# Altium PCB PCB1.PcbDoc
Units mil, origin at the board's own origin, x right, y up, seen from the top; angles counter-clockwise.
Board outline 2020 x 4000 mil, 2 copper layers (Top Layer, Bottom Layer); 26 components, 24 nets, 74 pads, 5 vias.
Unrouted connection lines stored in the file: 7.
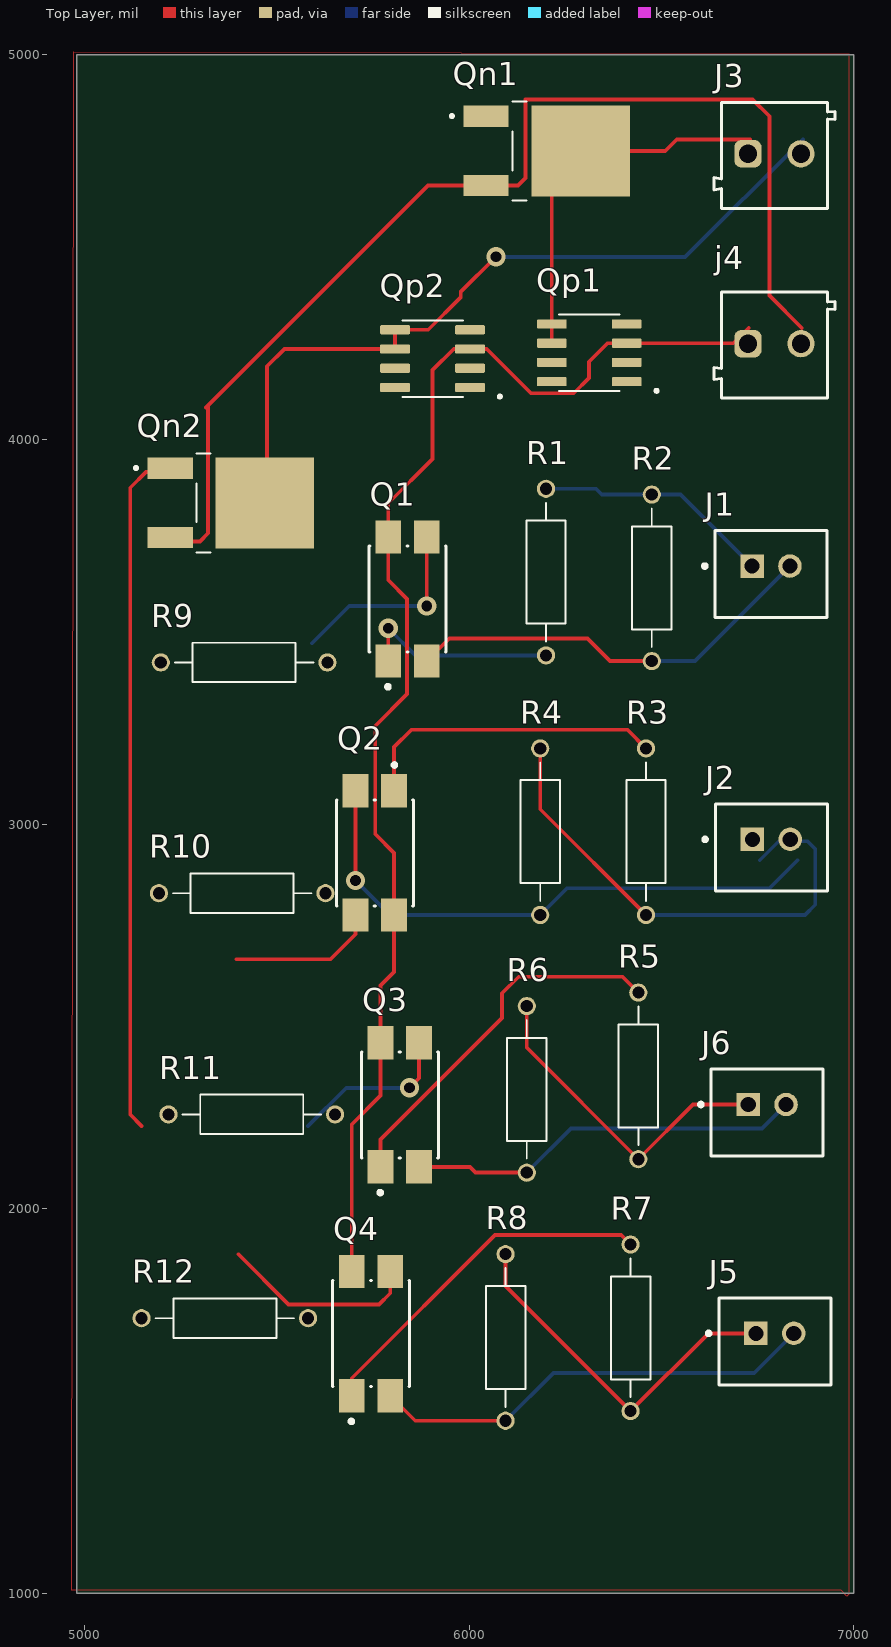
[diagram p0: Top Layer view]
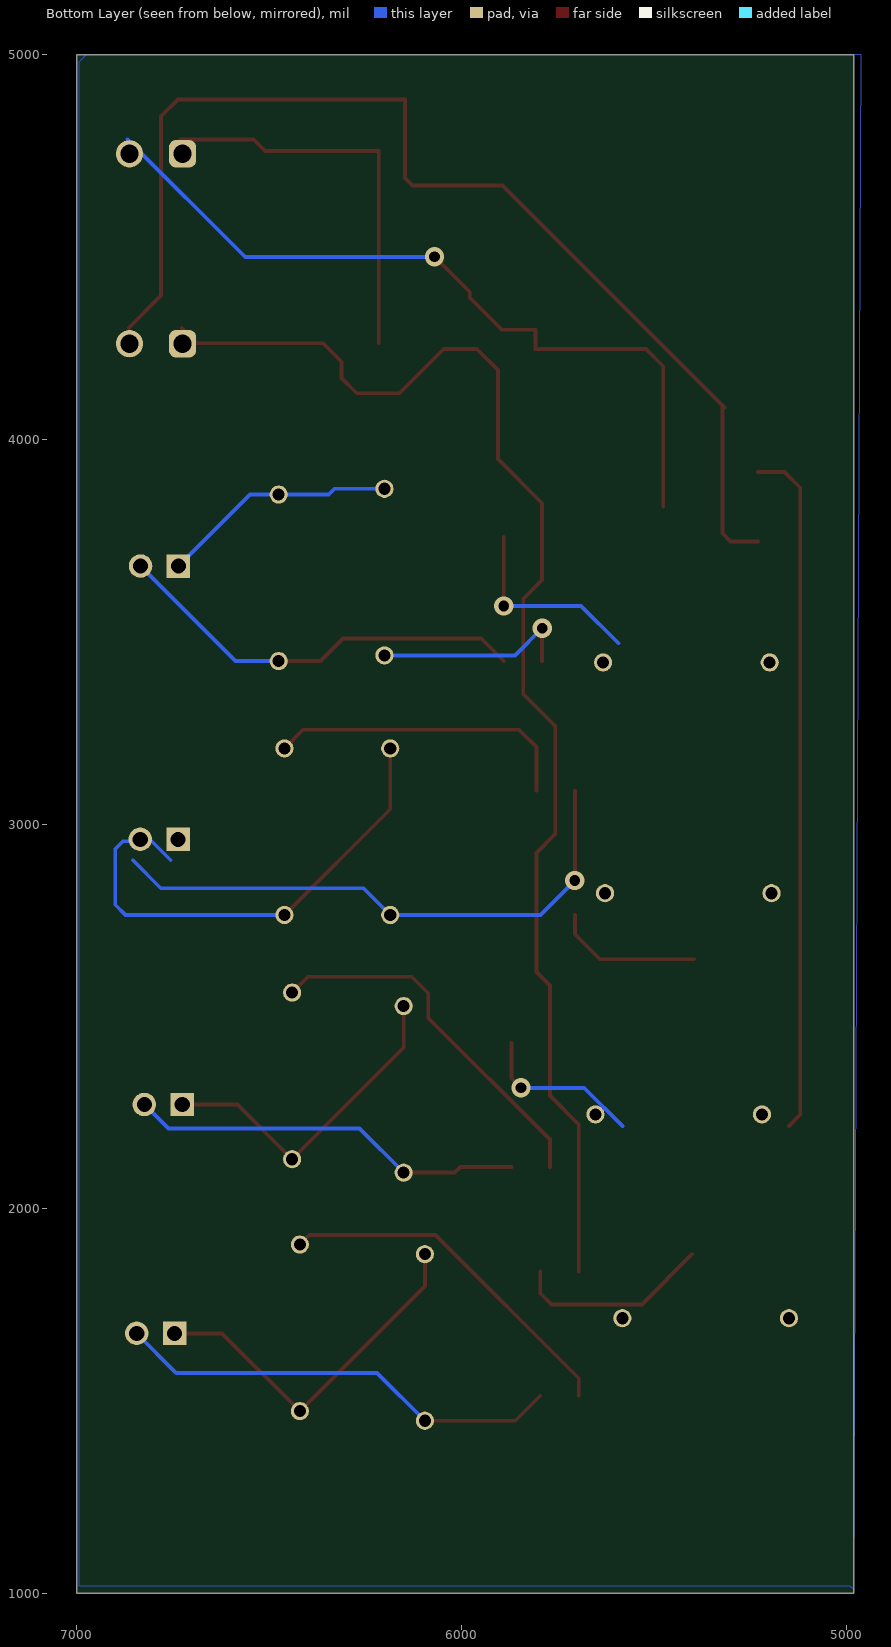
[diagram p1: Bottom Layer view, seen from below]
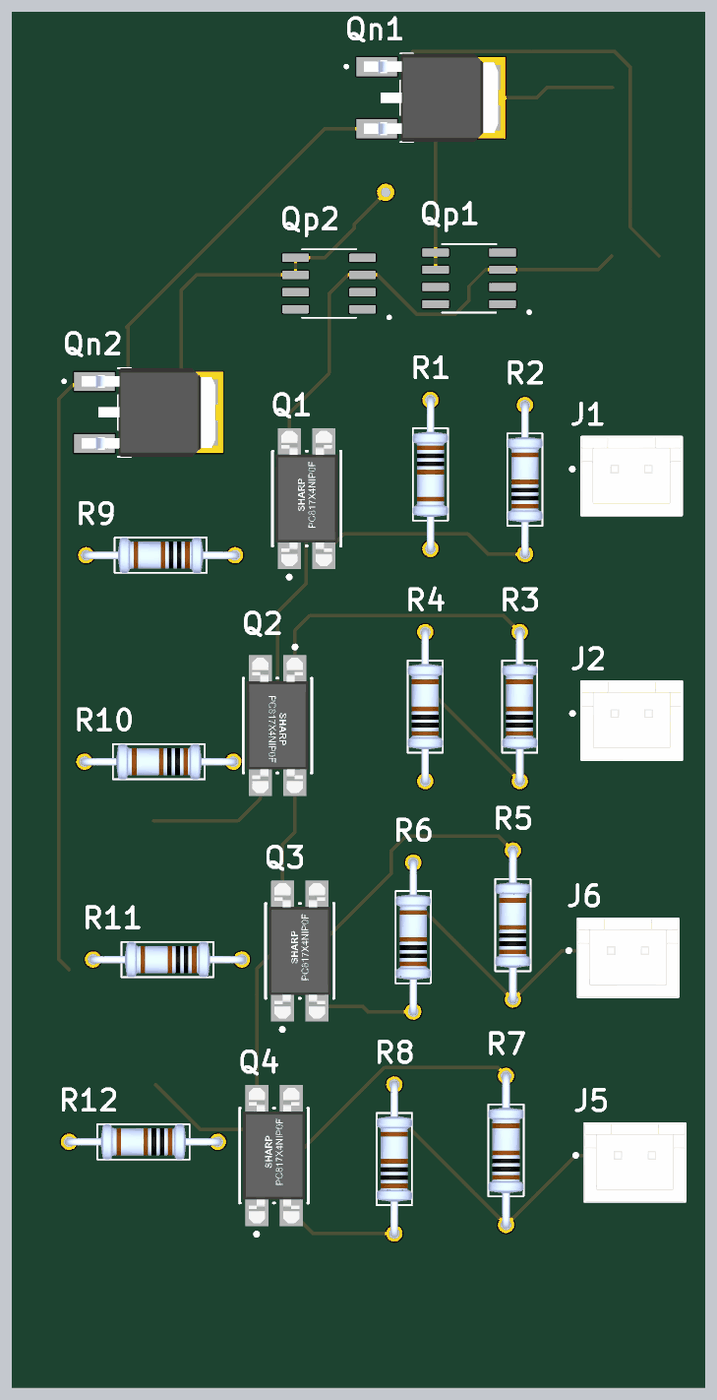
[diagram p2: 3D render of the assembled board from above, using the file's embedded part models]

## Layer stack, top to bottom
Top Solder: solder mask 0.4, Solder Resist, Dk 3.5
Top Layer: signal copper 1.4
Dielectric 1: dielectric 12.6, FR-4, Dk 4.8
Bottom Layer: signal copper 1.4
Bottom Solder: solder mask 0.4, Solder Resist, Dk 3.5

## Board outline
4980,1000 7000,1000 7000,5000 4980,5000

## Design rules (kind name [scope] priority, off if disabled: settings)
Clearance [All] p1: gap=10 ignorepadtopadclearanceinfootprint=FALSE
PolygonConnect [All] p1: connectstyle=Relief reliefconductorwidth=10 reliefentries=4 polygonreliefangle="90 Angle" airgapwidth=10
RoutingVias [All] p1: holewidth=28 width=50 viastyle="Through Hole" minholewidth=28 minwidth=50 maxholewidth=28 maxwidth=50
SolderMaskExpansion [All] p1: expansion=4 istentingtop=FALSE
SupplyNets "Schematic Supply Nets_1" [InNet('GND')] p1: voltage=0.000
SupplyNets "Schematic Supply Nets" [InNet('+12')] p2: voltage=0.000
Width [All] p1: maxlimit=10 minlimit=10 preferedwidth=10
30 further rules are at their usual default settings.

## Components (designator, comment, footprint, x,y, rotation, side; value= is the part's Value field where it differs from the comment)
J1 "B2B-XH-A(LF)(SN)" FP-B2B-XH-A_LF_SN-MFG 6785,3650 r0 top
J2 "B2B-XH-A(LF)(SN)" FP-B2B-XH-A_LF_SN-MFG 6785.79,2939.33 r0 top
J3 "691103110002" 691103110002 56793.95,54738.63 r0 top
j4 "691103110002" 691103110002 56793.95,54244.85 r0 top
J5 "B2B-XH-A(LF)(SN)" FP-B2B-XH-A_LF_SN-MFG 6795,1655 r0 top
J6 "B2B-XH-A(LF)(SN)" FP-B2B-XH-A_LF_SN-MFG 6775,2250 r0 top
Q1 "PC817X4NIP0F" FP-PC817X4NIP0F-MFG 5840,3585 r90 top
Q2 "PC817X4NIP0F" FP-PC817X4NIP0F-MFG 5755,2925 r270 top
Q3 "PC817X4NIP0F" FP-PC817X4NIP0F-MFG 5820,2270 r90 top
Q4 "PC817X4NIP0F" FP-PC817X4NIP0F-MFG 5745,1675 r90 top
Qn1 "TSM60NC390CP" TRANS_TSM60NC390CP 6201.42,4750 r0 top
Qn2 "TSM60NC390CP" TRANS_TSM60NC390CP 5380,3835 r0 top
Qp1 "FDS4953" SOIC127P600X175-8N 6312.44,4225 r180 top
Qp2 "FDS4953" SOIC127P600X175-8N 5905,4210 r180 top
R1 "MFR-25FBF52-10K" RESAD1100W55L680D260 6200,3655 r270 top
R2 "MFR-25FBF52-10K" RESAD1100W55L680D260 6475,3640 r90 top
R3 "MFR-25FBF52-10K" RESAD1100W55L680D260 6460,2980 r90 top
R4 "MFR-25FBF52-10K" RESAD1100W55L680D260 6185,2980 r90 top
R5 "MFR-25FBF52-10K" RESAD1100W55L680D260 6440,2345 r90 top
R6 "MFR-25FBF52-10K" RESAD1100W55L680D260 6150,2310 r90 top
R7 "MFR-25FBF52-10K" RESAD1100W55L680D260 6420,1690 r90 top
R8 "MFR-25FBF52-10K" RESAD1100W55L680D260 6095,1665 r90 top
R9 "MFR-25FBF52-430" RESAD1100W55L680D260 5415,3420 r180 top
R10 "MFR-25FBF52-430" RESAD1100W55L680D260 5410,2820 r180 top
R11 "MFR-25FBF52-430" RESAD1100W55L680D260 5435,2245 r180 top
R12 "MFR-25FBF52-430" RESAD1100W55L680D260 5365,1715 r180 top

## Footprints (in the part's own frame and the unit in brackets; to place one, negate y for a bottom-side part, rotate by r counter-clockwise, add the part's x,y. Pads: shape width x height; smd on the part's side, far side on the other; paste and mask are expansions set on the pad)
691103110002 [mm] "3,50mm - modular - blue - Horizontal wire entry - Pressure clamp - 8,4mm height - 02p"
  rrect50% 1.8x1.8 hole 1.2: 1(-1271.75,-1269.9)
  round 1.8 hole 1.2: 2(-1268.25,-1269.9)
  silkscreen extent -1274,-1273.5 -1266,-1266.5, body extent -1274,-1273.5 -1266,-1266.5, height 8.45
FP-B2B-XH-A_LF_SN-MFG [mm]
  rect 1.55x1.55 hole 1 paste-2539.97 mask+0: 1(-1.25,0.525)
  round 1.55 hole 1 paste-2539.97 mask+0: 2(1.25,0.525)
  silkscreen extent -4.5,-2.87 3.7,2.88, body extent -3.8,-2.98 3.8,2.98, height 0.25
FP-PC817X4NIP0F-MFG [mm]
  rect 2.2x1.7 smd paste+0 mask+0: 1(-4.1,1.27) 2(-4.1,-1.27) 3(4.1,-1.27) 4(4.1,1.27)
  silkscreen extent -5.92,-2.54 3.5,2.54, body extent -5.3,-2.64 5.3,2.64, height 0.25
RESAD1100W55L680D260 [mm]
  round 1.2 hole 0.8: 1(-5.5,0) 2(5.5,0)
  silkscreen extent -4.58,-1.3 4.58,1.3, body extent -5.77,-1.3 5.77,1.3, height 2.6
SOIC127P600X175-8N [mm]
  rrect25% 1.97x0.6 smd: 1(-2.475,1.905) 2(-2.475,0.635) 3(-2.475,-0.635) 4(-2.475,-1.905) 5(2.475,-1.905) 6(2.475,-0.635) 7(2.475,0.635) 8(2.475,1.905)
  silkscreen extent -4.54,-2.53 2,2.6
TRANS_TSM60NC390CP [mm]
  rect 3x1.4 smd: 1(-4,2.29) 3(-4,-2.29)
  rect 6.5x6 smd paste-4: 2_4(2.25,0)
  silkscreen extent -6.35,-3.27 -1.32,3.27, body extent -4.95,-3.27 4.95,3.27, height 2.39

## Part data
J1 J2 J5 J6: library part CMP-2000-05888-3, "CONN HEADER VERT 2POS 2.5MM", Color=Natural, Contact Resistance=20mR, Current Rating=3A, Housing Color=White, Insulation Resistance=1GR, Max Operating Temperature=85°C, Max Voltage Rating (AC)=250V, Min Operating Temperature=-25°C, Connector Type="Male Pin", Contact Material=Brass, Contact Plating=Tin, Contact Type="Male Pin", Depth=5.75mm, Fastening Type=Detent, Housing Material=Polyamide, Lead Free="Lead Free", Lead Pitch=2.5mm, Length=7.4mm, Max Current Rating=3A, Max Voltage Rating (DC)=250V, Mount="Through Hole", Number of Contacts=2, Number of Positions=2, Number of Rows=1, Orientation=Straight, Packaging=Bulk, Pitch=2.5mm, REACH SVHC="No SVHC", Series=XH, Termination=Solder, Voltage Rating=250V, Voltage Rating (AC)=250V, Wire/Cable Gauge=22AWG
J3 j4: library part CMP-1502-03254-2, Color=Blue, Current=10A, Max Operating Temperature=105°C, Min Operating Temperature=-40°C, Voltage=125V, Contact Material="Brass, Copper, Nickel, Tin, Zinc", Contact Plating=Tin, Current Rating=10A, Height=8.5mm, Housing Material=Nylon, Lead Pitch=3.5mm, Length=7mm, Mount="Through Hole", NexarPartId=18818286, Number of Contacts=2, Number of Levels=1, Number of Pins=2, Number of Positions Per Level=2, Number of Rows=1, Packaging=Box, Pitch=3.5052mm, Plating=Steel, REACH SVHC=Unknown, RoHS=Compliant, Stripping Length=-6mm, Termination=Screw, Voltage Rating=125V, Width=8mm, Wire Gauge (Max)=26AWG, Wire Gauge (Min)=16AWG, Wire/Cable Gauge=26AWG
Q1 Q2 Q3 Q4: library part CMP-65434-000001-1, "OPTOISOLATOR 5KV TRANS 4SMD", Collector Emitter Voltage=80V, Emiiter Collector Voltage=6V, Forward Current=20mA, Forward Voltage=1.2V, Isolation Voltage=5kVrms, Manufacturer=Sharp, Max Current Transfer Ratio=600%, Min Current Transfer Ratio=50%, Power Dissipation=200mW, Temperature="-30°C to +100°C", Temperature Range High=+100°C, Temperature Range Low=-30°C, Automotive=No, Category=Trans, ComponentLink2Description=Datasheet, ComponentLink2URL=https://www.sharpsde.com/fileadmin/products/Optoelectronics/Isolation%20Devices/Specs%20Photocoupler/PC817XxNIP0F_17Jun08_Spec_ED-04P129A.pdf, Device Class L1=Optoelectronics, Device Class L2=Optocouplers, Device Class L3=unset, Digikey Description="OPTOISOLATOR 5KV TRANS 4SMD", Height=4.6mm, Lead Free=Yes, Manufacturer Part Number=PC817X4NIP0F, Mouser Description="Transistor Output Optocouplers Photocoupler 300-600% CRT", Octopart=https://octopart.com/pc817x4nip0f-sharp-20650453, Package=PC817X4NIP0F, Reverse Voltage=6V, RoHS=TRUE, Standoff Height=0.1mm
Qn1 Qn2: "600V, 11A, Single N-Channel High Voltage MOSFETs", Package="TO-252-3 Taiwan Semiconductor", Check_prices=https://www.snapeda.com/parts/TSM60NC390CP/Taiwan+Semiconductor/view-part/?ref=eda, MF="Taiwan Semiconductor", MP=TSM60NC390CP, SnapEDA_Link=https://www.snapeda.com/parts/TSM60NC390CP/Taiwan+Semiconductor/view-part/?ref=snap
Qp1 Qp2: "Mosfet Array 2 P-Channel _Dual_ 30V 5A 900mW Surface Mount 8-SOIC", Package="SOIC-8 ON Semiconductor", Availability=Unavailable, MF="ON Semiconductor", MP=FDS4953, Price=None, SnapEDA_Link=https://www.snapeda.com/parts/FDS4953/ON%20Semiconductor/view-part/1564044/?ref=snap
R1 R2 R3 R4 R5 R6 R7 R8: "10.2 kOhms Â±1% 0.25W, 1/4W Through Hole Resistor Axial - Metal Film", Package="Axial Yageo", Availability="In Stock", Check_prices=https://www.snapeda.com/parts/MFR-25FBF52-10K/Yageo/view-part/?ref=eda, MF=Yageo, MP=MFR-25FBF52-10K, Price=None, Purchase-URL=https://pricing.snapeda.com/search/part/MFR-25FBF52-10K/?ref=eda, SnapEDA_Link=https://www.snapeda.com/parts/MFR-25FBF52-10K/Yageo/view-part/?ref=snap
R9 R10 R11 R12: library part MFR-25FBF52-10K, "10.2 kOhms Â±1% 0.25W, 1/4W Through Hole Resistor Axial - Metal Film", Package="Axial Yageo", Availability="In Stock", Check_prices=https://www.snapeda.com/parts/MFR-25FBF52-10K/Yageo/view-part/?ref=eda, MF=Yageo, MP=MFR-25FBF52-10K, Price=None, Purchase-URL=https://pricing.snapeda.com/search/part/MFR-25FBF52-10K/?ref=eda, SnapEDA_Link=https://www.snapeda.com/parts/MFR-25FBF52-10K/Yageo/view-part/?ref=snap

## Via types
v1: diameter 50, hole 28, Top Layer to Bottom Layer, 5 vias

## Nets (pads, with @x,y where several pads share a name; then routed paths per layer and width w, separated by ;. In a path a pad name is that pad's centre, name@x,y a point inside that pad or via, vN(x,y) a via of type N, cw(c..) or ccw(c..) an arc to the next point about the centre after c; other vN are vias at no path point)
+12: j4.1 Q1.4 Q2.4 Q3.4 Q4.4 Qp1.3 Qp2.3 | length 3499.4
  Top Layer w10: Q4.4 5695,2219 5770,2294 Q3.4 5770,2580 5805,2615 Q2.4 5805,2925 5756,2974 5756,3255 5839,3338 5839,3585 5790,3634 Q1.4 5790,3834 5905,3949 5905,4180 5960,4235 Qp2.3 6046,4235 6161,4120 6272,4120 6312,4160 6312,4202 6360,4250 Qp1.3 6687.2,4250 6727.2,4290
GND: j4.2 Qn1.3 Qn2.3 | length 2942.2
  Top Layer w10: Qn2.3@5228.94,3734.84 5300,3734.84 5321,3755.84 5321,4083 ; 5316,4083 5892.84,4659.84 ; 5897.84,4659.84 Qn1.3 6126.84,4659.84 6147,4680 6147,4884 6737,4884 6781,4840 6781,4374 6865,4290
MCU_GND1: J1.2 Q1.2 R2.1 | length 1095.1
  Top Layer w10: Q1.2 5948.42,3482 6308,3482 6366.54,3423.46 R2.1
  Bottom Layer w10: R2.1 6587.01,3423.46 J1.2
MCU_GND2: J2.2 Q2.2 R4.1 | length 1478.6
  Top Layer w10: v1(5705,2853) Q2.2
  Bottom Layer w10: v1(5705,2853) 5794.54,2763.46 R4.1 6254.54,2833 6781.54,2833 6854.21,2905.67
MCU_GND3: J6.2 Q3.2 R6.1 | length 1033.9
  Top Layer w10: Q3.2 6002,2108.58 6017.12,2093.46 R6.1
  Bottom Layer w10: R6.1 6264.54,2208 6761.54,2208 J6.2
MCU_GND4: J5.2 Q4.2 R8.1 | length 1170.3
  Top Layer w10: Q4.2 5860.12,1448.46 R8.1
  Bottom Layer w10: R8.1 6219.54,1573 6741.54,1573 J5.2
MCU_signal1: J1.1 R1.1 R2.2 | length 619
  Bottom Layer w10: R1.1 6330,3871.54 6345,3856.54 R2.2 6549.92,3856.54 J1.1
MCU_signal2: J2.1 R3.1 R4.2 | length 1315.9
  Top Layer w10: R4.2 6185,3038.46 R3.1
  Bottom Layer w10: R3.1 6873.46,2763.46 6900,2790 6900,2935 6880,2955 6805.12,2955 6755.79,2905.67
MCU_signal3: J6.1 R5.1 R6.2 | length 862.9
  Top Layer w10: R6.2 6150,2418.46 R5.1 6582.21,2270.67 J6.1
MCU_signal4: J5.1 R7.1 R8.2 | length 952.2
  Top Layer w10: R8.2 6095,1798.46 R7.1 6622.21,1675.67 J5.1
motor1: J3.1 Qn1.2_4 Qp1.5 Qp1.6 | length 1027.4
  Top Layer w10: Qp1.6 Qp1.5 6215,4750 Qn1.2_4 6510,4750 6540,4780 6730,4780
motor2: J3.2 Qn2.2_4 Qp2.5 Qp2.6 | length 2040.5
  Top Layer w10: Qn2.2_4@5475,3825 5475,4190 5520,4235 Qp2.6 Qp2.5 5894,4285 5978.17,4369.17 5978.17,4383.17 v1(6070,4475)
  Bottom Layer w10: v1(6070,4475) 6071,4474 6561.8,4474 6867.8,4780
NetQ1_1: Q1.1 R1.2 | length 524.6
  Top Layer w10: Q1.1 v1(5790,3509)
  Bottom Layer w10: v1(5790,3509) 5860.54,3438.46 R1.2
NetQ1_3: Q1.3 R9.1 | length 518.1
  Top Layer w10: v1(5890,3567) Q1.3
  Bottom Layer w10: 5591.54,3470 5688.54,3567 v1(5890,3567)
NetQ2_1: Q2.1 R3.2 | length 807.3
  Top Layer w10: Q2.1 5805,3200 5850,3245 6411.54,3245 R3.2
NetQ2_3: Q2.3 R10.1 | length 387
  Top Layer w10: 5395,2648.46 5640,2648.46 5705,2713.46 Q2.3
NetQ3_1: Q3.1 R5.2 | length 971.3
  Top Layer w10: Q3.1 5770,2180 6086,2496 6086,2560 6129,2603 6398.54,2603 R5.2
NetQ3_3: Q3.3 R11.1 | length 432.2
  Top Layer w10: v1(5845,2314) 5870,2339 Q3.3
  Bottom Layer w10: 5581.54,2215 5680.54,2314 v1(5845,2314)
NetQ4_1: Q4.1 R7.2 | length 934.6
  Top Layer w10: Q4.1 5695,1559 6067,1931 6395.54,1931 R7.2
NetQ4_3: Q4.3 R12.1 | length 517.5
  Top Layer w10: 5400,1881.54 5530.54,1751 5766,1751 5795,1780 Q4.3
signal1: Qp1.4
signal2: Qn1.1
signal3: Qn2.1 R11.2 | length 1798.3
  Top Layer w10: 5148.46,2215 5119,2244.46 5119,3874.16 5160,3915.16 Qn2.1@5228.94,3915.16
signal4: R12.2
pads on no net: Qp1.1 Qp1.2 Qp1.7 Qp1.8 Qp2.1 Qp2.2 Qp2.4 Qp2.7 Qp2.8 R9.2 R10.2

## Polygon pours and split planes (outlines as drawn)
GND on Top Layer "GND_L01_P000" (solid, pour order 0): 4972.49,4997.51 4972.51,5007.49 6987.49,5002.51 6987.49,997.51 6982.49,992.51 6967.49,1007.51 4967.49,1007.51
GND on Bottom Layer "GND_L02_P001" (solid, pour order 1): 4960,5000 6975,5000 6995,4980 6995,1020 4990,1020 4980,1010